# Altium PCB hall_effect_module.PcbDoc
Units mm, origin at the board's own origin, x right, y up, seen from the top; angles counter-clockwise.
Board outline 152.4 x 101.6 mm, 2 copper layers (Top Layer, Bottom Layer), stack 1.569 mm thick; 18 components, 16 nets, 95 pads, 23 vias.
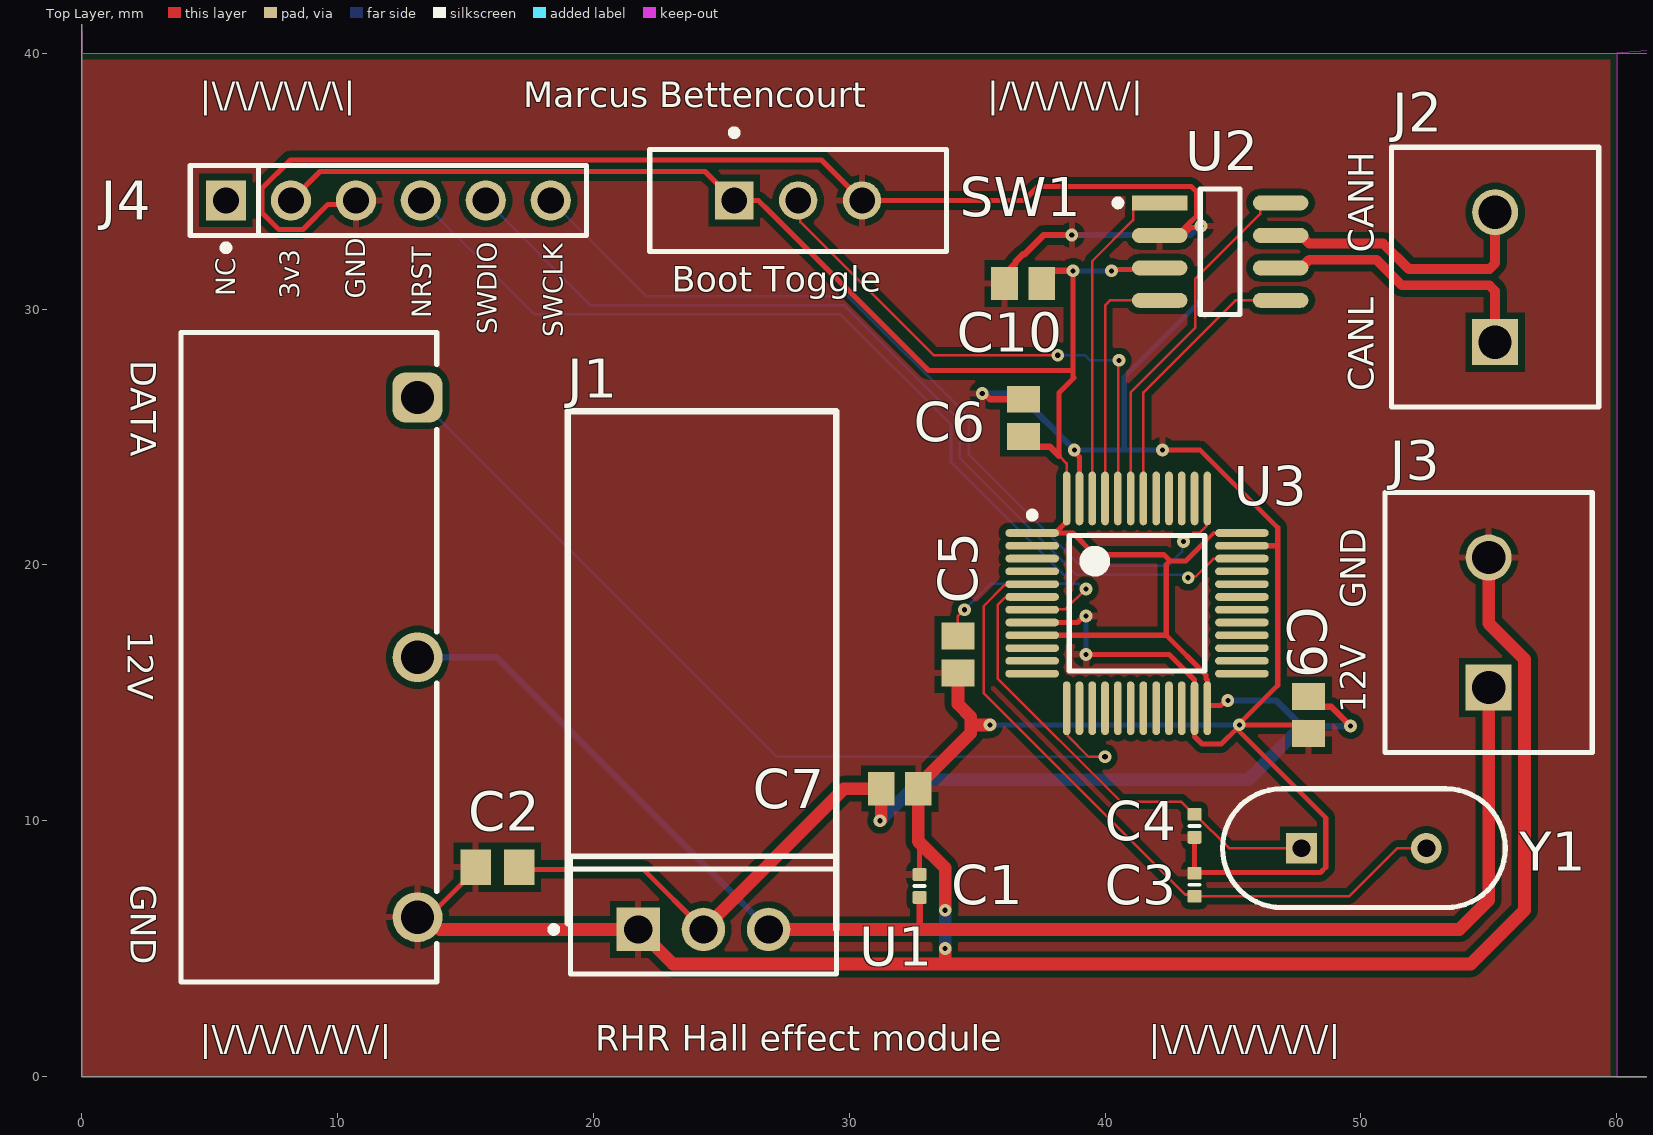
[diagram p0: Top Layer view]
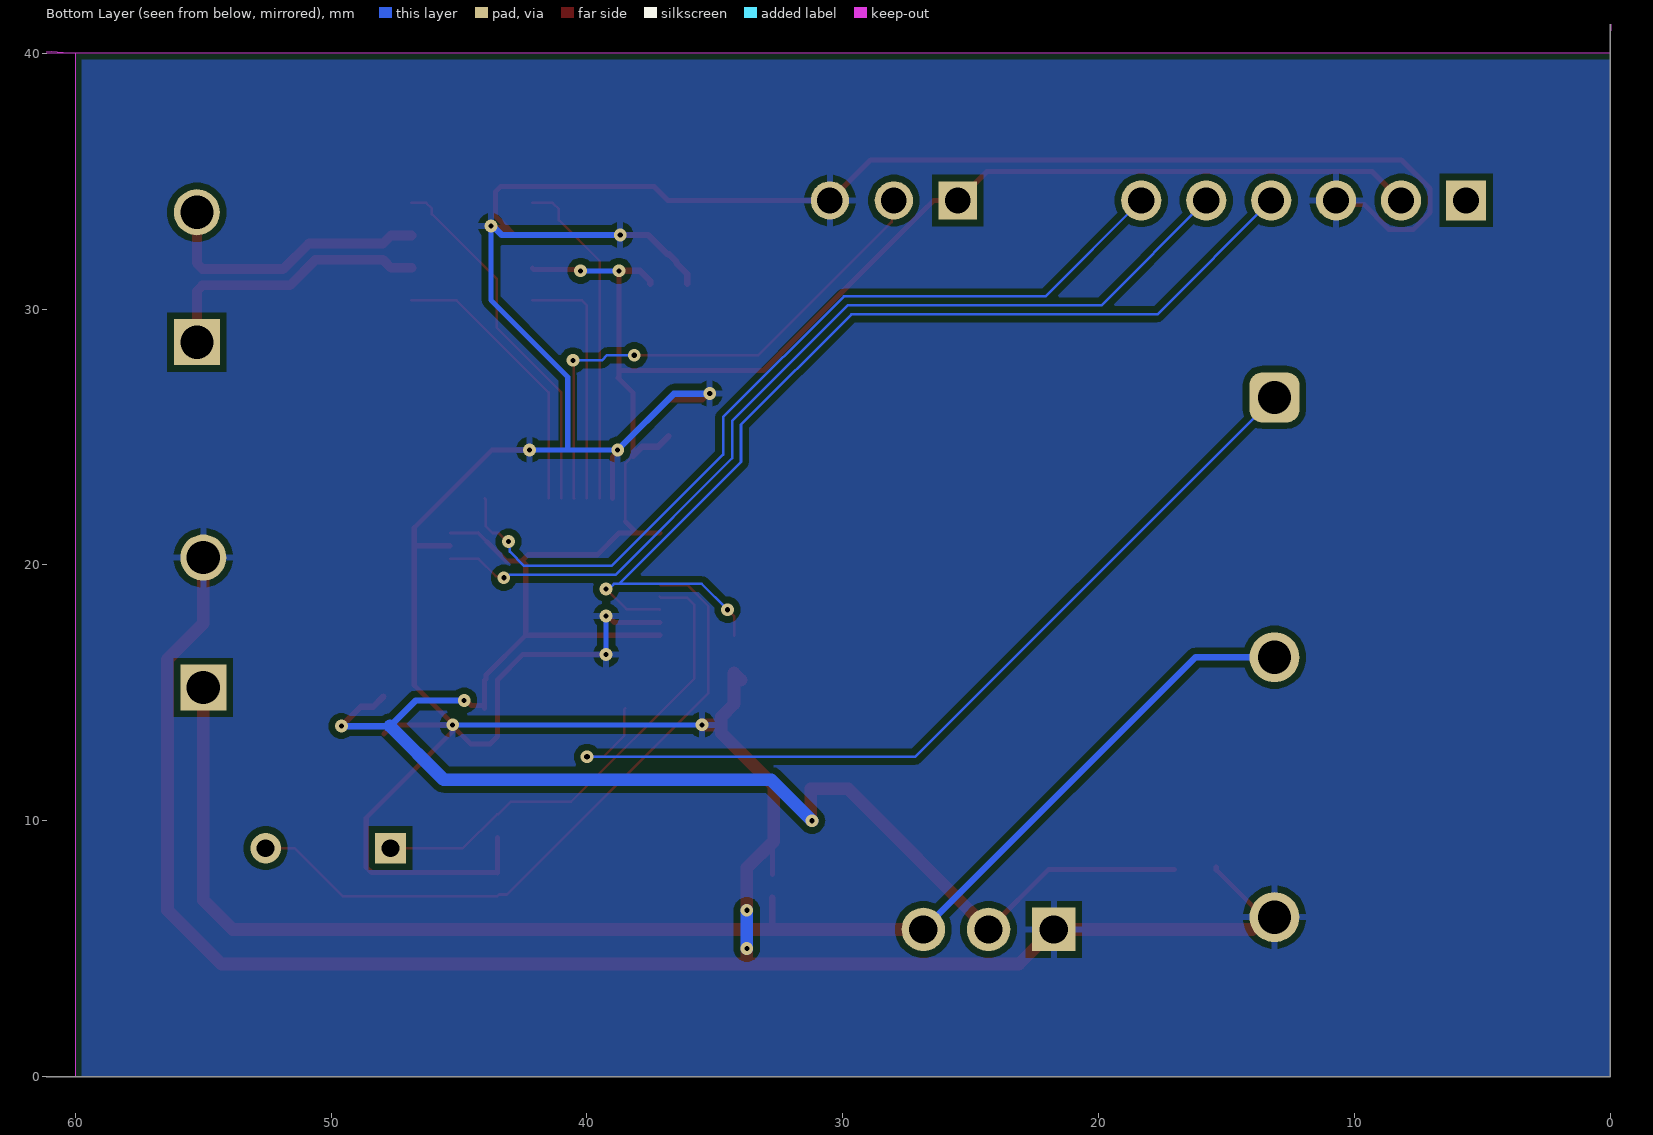
[diagram p1: Bottom Layer view, seen from below]
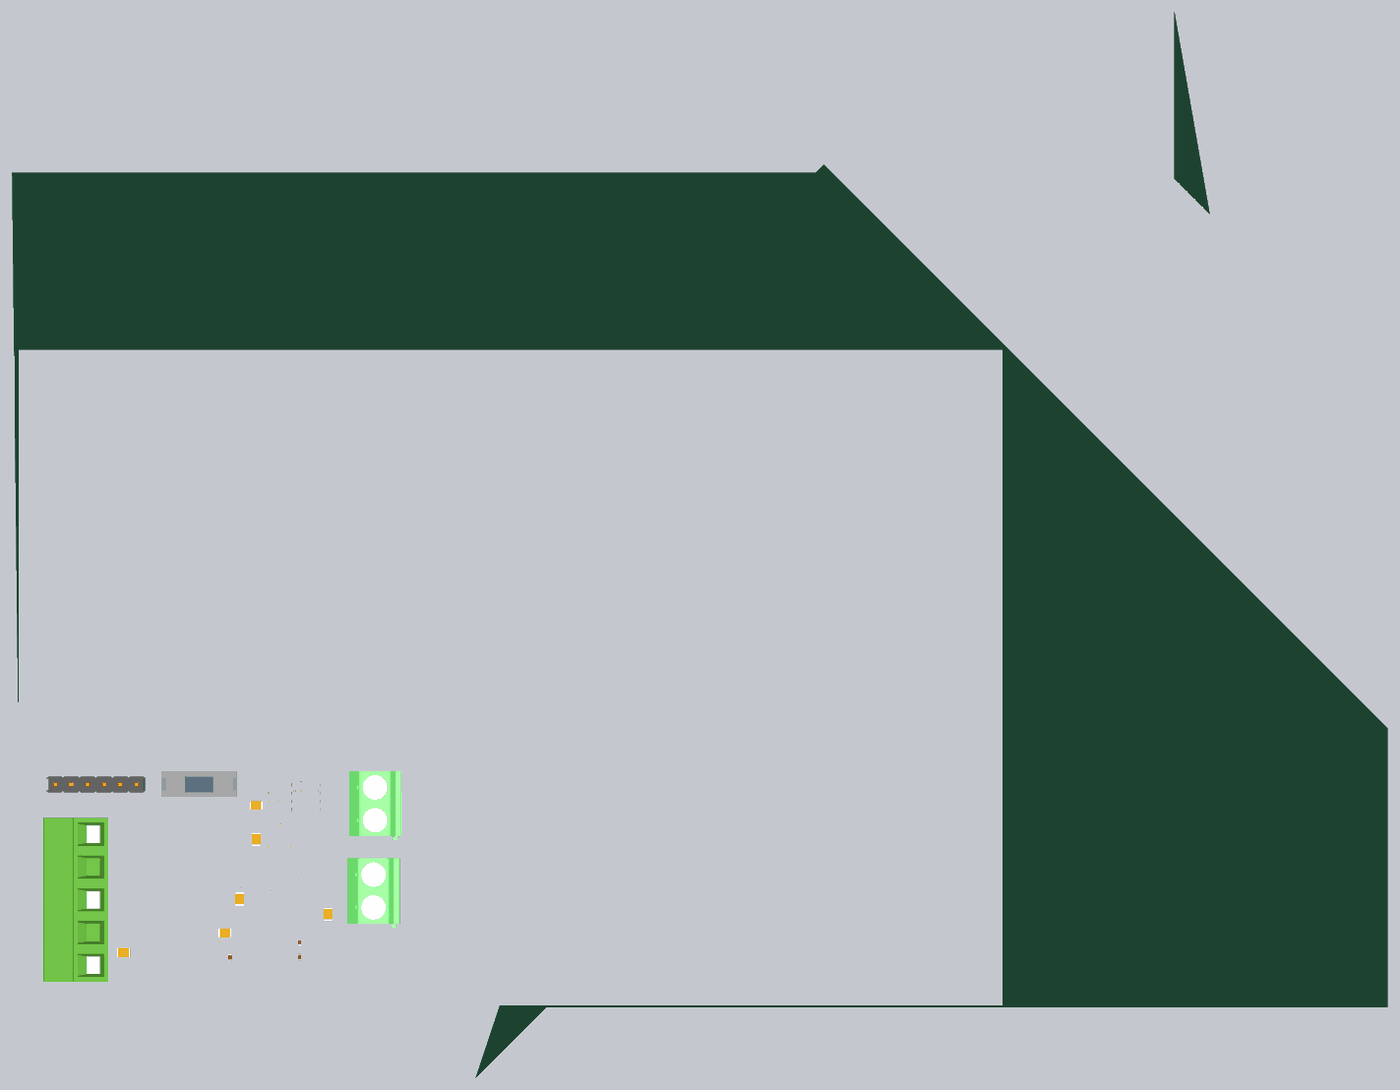
[diagram p2: 3D render of the assembled board from above, using the file's embedded part models]

## Layer stack, top to bottom
Top Solder: solder mask 0.0254, SM-001, Dk 4
Top Layer: signal copper 0.035
Dielectric 1: core 1.4986, Core-043, Dk 4.3
Bottom Layer: signal copper 0.035
Bottom Solder: solder mask 0.0254, SM-001, Dk 4

## Board outline
0,0 152.4,0 152.4,101.6 0,101.6
cut-out: 85,31.5 85,3 70.75,-11.25
cut-out: 60,40 60,0 77.5,0 78.75,1.25 77.75,2.25 77.75,41.5
cut-out: 0,40 75,40 75,0 75.25,-0.25 212,-0.25 212,43 124.75,130.25 123.5,129 -1,129
cut-out: 179,154 179,128 184.5,122.5

## Design rules (kind name [scope] priority, off if disabled: settings)
Clearance Clearance_1 [InComponent('U1')] p1: gap=0.25 ignorepadtopadclearanceinfootprint=TRUE
Clearance [All] p2: gap=0.25 ignorepadtopadclearanceinfootprint=TRUE
DiffPairsRouting [All] p1: maxlimit=0.254 minlimit=0.254 mostfreqgap=0.254 toplayer_minwidth=0.381 toplayer_maxwidth=0.381 toplayer_prefwidth=0.381 bottomlayer_minwidth=0.381 bottomlayer_maxwidth=0.381 bottomlayer_prefwidth=0.381 maxuncoupledlength=12.7
MinimumSolderMaskSliver [All] p1: minsoldermaskwidth=0.2
PolygonConnect [All] p1: connectstyle=Relief reliefconductorwidth=0.254 reliefentries=4 polygonreliefangle="90 Angle" airgapwidth=0.254
RoutingVias [All] p1: holewidth=0.2 width=0.45 viastyle="Through Hole" minholewidth=0.2 minwidth=0.5 maxholewidth=1 maxwidth=1.5
SilkToSolderMaskClearance SilkToSolderMaskClearance_2 [IsPad     & HasFootprint('691241600003')] p1: minsilkscreentomaskgap=0.175 clearancetoexposedcopper=TRUE
SilkToSolderMaskClearance SilkToSolderMaskClearance_1 [IsPad & HasFootprint('CAPC0402(1005)60_L')] p2: minsilkscreentomaskgap=0.125 clearancetoexposedcopper=TRUE
SilkToSolderMaskClearance [IsPad] p3: minsilkscreentomaskgap=0.2 clearancetoexposedcopper=FALSE
SolderMaskExpansion [All] p1: expansion=0 istentingtop=FALSE
SupplyNets "Schematic Supply Nets_2" [InNet('3V3')] p1: voltage=0.000
SupplyNets "Schematic Supply Nets_1" [InNet('GND')] p2: voltage=0.000
SupplyNets "Schematic Supply Nets" [InNet('12V')] p3: voltage=0.000
Width [All] p1: maxlimit=0.75 minlimit=0.1 preferedwidth=0.25 minimp=50.000000 maximp=50.000000 favimp=50.000000
27 further rules are at their usual default settings.

## Classes and differential pairs
differential pair CAN: +CAN_P -CAN_N

## Components (designator, comment, footprint, x,y, rotation, side; value= is the part's Value field where it differs from the comment)
C1 "Capacitor 100nF +/-20% 25V 0402" CAPC0402(1005)60_L 32.75,7.45 r270 top value=100nF
C2 "Capacitor 10 uF +/- 10% 16 V 0805" CAPC2013X135X45NL10T25 16.246,8.182 r0 top value=10µF
C3 "Capacitor 22pF +/-10% 50V 0402" CAPC0402(1005)60_L 43.5,7.5 r270 top value=22pF
C4 "Capacitor 22pF +/-10% 50V 0402" CAPC0402(1005)60_L 43.5,9.8 r90 top value=22pF
C5 "Capacitor 100 nF +/-10% 50 V 0805" CAPC2013X95X50LL10T25 34.25,16.5 r90 top value=100nF
C6 "Capacitor 100 nF +/-10% 50 V 0805" CAPC2013X95X50LL10T25 36.812,25.754 r270 top value=100nF
C7 "Capacitor 100 nF +/-10% 50 V 0805" CAPC2013X95X50LL10T25 31.975,11.25 r180 top value=100nF
C9 "Capacitor 100 nF +/-10% 50 V 0805" CAPC2013X95X50LL10T25 47.954,14.131 r90 top value=100nF
C10 "Capacitor 100 nF +/-10% 50 V 0805" CAPC2013X95X50LL10T25 36.8,31 r0 top value=100nF
J1 "691241600003" 691241600003 8.871,16.39 r270 top
J2 "1729128" PHOE-1729128-2_V 55.25,31.25 r90 top
J3 "1729128" PHOE-1729128-2_V 55,17.75 r90 top
J4 "22-28-4063" FP-22-28-4063-MFG 11.98,34.25 r0 top
SW1 "EG1218" ESWI-EG1218_V 28,34.25 r0 top
U1 "LD1117V33" STM-TO220-3 24.3,5.75 r90 top
U2 "TCAN334DR" FP-D0008A-IPC_B 44.5,32.25 r0 top
U3 "STM32F103C8T6TR" STM-LQFP48_M 41.25,18.5 r0 top
Y1 "49S/18PF" JPY-49S-18PF 50.12,8.926 r0 top

## Footprints (in the part's own frame and the unit in brackets; to place one, negate y for a bottom-side part, rotate by r counter-clockwise, add the part's x,y. Pads: shape width x height; smd on the part's side, far side on the other; paste and mask are expansions set on the pad)
691241600003 [mm] "Vertical Cable Entry with Rising Cage Clamp, pitch 10.16mm, 03p"
  rrect50% 1.95x1.95 hole 1.3: 1(-10.16,4.25)
  round 1.95 hole 1.3: 2(0,4.25) 3(10.16,4.25)
  silkscreen extent -12.7,-5 12.7,5, body extent -12.7,-5 12.7,5, height 8.2
CAPC0402(1005)60_L [mm] "Chip Capacitor, Body 1.0x0.5mm, Height 0.6mm, IPC High Density"
  rrect25% 0.5x0.55 smd: 1(-0.45,0) 2(0.45,0)
  silkscreen extent 0,-0.2 0,0.2, body extent -0.5,-0.25 0.5,0.25, height 0.6
CAPC2013X95X50LL10T25 [mm] "Chip Capacitor, 2-Leads, Body 2.10x1.35mm, IPC High Density"
  rect 1.05x1.3 smd: 1(-0.725,0) 2(0.725,0)
  body extent -1.05,-0.67 1.05,0.67, height 0.95
CAPC2013X135X45NL10T25 [mm] "Chip Capacitor, 2-Leads, Body 2.10x1.35mm, IPC Medium Density"
  rect 1.2x1.4 smd: 1(-0.85,0) 2(0.85,0)
  body extent -1.05,-0.67 1.05,0.67, height 1.35
ESWI-EG1218_V [mm] "THD, 3-Leads, Body 11.6x4mm, Pitch 2.5mm"
  rect 1.5x1.5 hole 1: 1(-2.5,0)
  round 1.5 hole 1: 2(0,0) 3(2.5,0)
  silkscreen extent -5.8,-2 5.8,2.77, body extent -5.8,-2 5.8,2, height 7.4
FP-22-28-4063-MFG [mm]
  rect 1.57x1.57 hole 1.02 paste-2539.97 mask+0: 1(-6.35,0)
  round 1.57 hole 1.02 paste-2539.97 mask+0: 2(-3.81,0) 3(-1.27,0) 4(1.27,0) 5(3.81,0) 6(6.35,0)
  silkscreen extent -7.75,-1.97 7.75,1.37, body extent -7.85,-1.47 7.85,1.47, height 0.25
FP-D0008A-IPC_B [mm]
  rect 2.169x0.582 smd paste+0 mask+0: 1(-2.364,1.905)
  rrect100% 2.169x0.582 smd paste+0 mask+0: 2(-2.364,0.635) 3(-2.364,-0.635) 4(-2.364,-1.905) 5(2.364,-1.905) 6(2.364,-0.635) 7(2.364,0.635) 8(2.364,1.905)
  silkscreen extent -4.12,-2.45 0.78,2.45, body extent -3.7,-2.7 3.7,2.7, height 0.25
JPY-49S-18PF [mm] "THD, 2-Leads, Body 11.05x4.65mm, Pitch 4.88mm"
  rect 1.2x1.2 hole 0.7: 1(-2.44,0)
  round 1.2 hole 0.7: 2(2.44,0)
  silkscreen extent -5.53,-2.32 5.53,2.32, body extent -5.52,-2.32 5.53,2.33, height 3.5
PHOE-1729128-2_V [mm] "Receptacle, 2-Leads, Body 8.1x10.16mm, Pitch 5.08mm"
  rect 1.8x1.8 hole 1.3: 1(-2.54,0)
  round 1.8 hole 1.3: 2(2.54,0)
  silkscreen extent -5.08,-4.05 5.08,4.05, body extent -5.65,-4.05 5.08,4.05, height 10.01
STM-LQFP48_M [mm] "QFP, 48-Leads, Body 7x7mm, Pitch 0.5mm, IPC Low Density"
  oval 2.1x0.3 smd: 1(-4.1,2.75) 2(-4.1,2.25) 3(-4.1,1.75) 4(-4.1,1.25) 5(-4.1,0.75) 6(-4.1,0.25) 7(-4.1,-0.25) 8(-4.1,-0.75) 9(-4.1,-1.25) 10(-4.1,-1.75) 11(-4.1,-2.25) 12(-4.1,-2.75) 25(4.1,-2.75) 26(4.1,-2.25) 27(4.1,-1.75) 28(4.1,-1.25) 29(4.1,-0.75) 30(4.1,-0.25) 31(4.1,0.25) 32(4.1,0.75) 33(4.1,1.25) 34(4.1,1.75) 35(4.1,2.25) 36(4.1,2.75)
  oval 0.3x2.1 smd: 13(-2.75,-4.1) 14(-2.25,-4.1) 15(-1.75,-4.1) 16(-1.25,-4.1) 17(-0.75,-4.1) 18(-0.25,-4.1) 19(0.25,-4.1) 20(0.75,-4.1) 21(1.25,-4.1) 22(1.75,-4.1) 23(2.25,-4.1) 24(2.75,-4.1) 37(2.75,4.1) 38(2.25,4.1) 39(1.75,4.1) 40(1.25,4.1) 41(0.75,4.1) 42(0.25,4.1) 43(-0.25,4.1) 44(-0.75,4.1) 45(-1.25,4.1) 46(-1.75,4.1) 47(-2.25,4.1) 48(-2.75,4.1)
  silkscreen extent -4.22,-2.65 2.65,3.57, body extent -3.5,-3.5 3.5,3.5, height 1.6
STM-TO220-3 [mm] "FM, 3-Leads, Body 10.4x4.6mm, Pitch 2.55mm"
  rect 1.7x1.7 hole 1.1: 1(0,2.55)
  round 1.7 hole 1.1: 2(0,0) 3(0,-2.55)
  silkscreen extent -1.74,-5.2 2.86,5.97, body extent -1.74,-5.2 2.86,5.2, height 19.68

## Part data
C1: library part CMP-001-00065-4, "Chip Capacitor, 100nF +/-20%, 25V, 0402, Thickness 0.6 mm", Case/Package=0402, Max Operating Temperature=85°C, Min Operating Temperature=-55°C, Tolerance=10%, Voltage Rating=25V, Mounting Technology=SMT, Pins=2
C2: library part CMP-001-00015-6, "Chip Capacitor, 10 uF, +/- 10%, 16 V, 0805 (2012 Metric)", Capacitor Type=Ceramic, Case/Package=0805, Max Operating Temperature=85°C, Min Operating Temperature=-55°C, Tolerance=10%, Voltage Rating=16V, Mounting Technology=SM, Pins=2, RoHS Compliant=True
C3 C4: library part CMP-001-00073-3, "Chip Capacitor, 22pF +/-10%, 50V, 0402, Thickness 0.6 mm", Case/Package=0402, Max Operating Temperature=85°C, Min Operating Temperature=-55°C, Tolerance=10%, Voltage Rating=50V, Mounting Technology=SMT, Pins=2
C5 C6 C7 C9 C10: library part CMP-001-00018-6, "Chip Capacitor, 100 nF, +/- 10%, 50 V, 0805 (2012 Metric)", Capacitor Type=Ceramic, Case/Package=0805, Max Operating Temperature=125°C, Min Operating Temperature=-55°C, Tolerance=10%, Voltage Rating=50V, Mounting Technology=SM, Pins=2, RoHS Compliant=True
J1: library part CMP-03913-78871229-2, "Terminal Block, 10.16MM Pitch, Vertical, Rising Cage Clamp, 14-30 AWG, 3 Pin", Lead Pitch=10.16mm, Number of Pins=3, Packaging=Box
J2 J3: library part CMP-2000-05815-1, "PCB Terminal Block, 13.5 A, 400 V, 2-Pin THD, RoHS, Bulk", Current Rating=13500mA, Manufacturer="Phoenix Contact", Package Description="2-Pin Through Hole Device, Body 8.1 x 10.16 mm, Pitch 5.08 mm", Package Reference=1729128-2, Package Version=03/2015, Voltage Rating=400V, Datasheet URL=https://datasheet.ciiva.com/16046/1729128-16046181.pdf, Datasheet Version=12/2013, Manufacturer URL=http://www.phoenixcontact.com/, Mounting Technology=ThroughHole, No. of Positions=2, No. of Rows=1, Orientation=Horizontal, Package URL=https://www.phoenixcontact.com/online/portal/pi/pxc/product_detail_page/!ut/p/b1/3VdJjqNKFDxLH8AFycySyWY2ozFsEPOMMQaDOX1XedGL_1Vdm5YXJleknhSKeBkvI6EA8ncAo3AYoDhBQGco6KN7VURTdemj9us_IEKEZo_YHiPAEWEFmDGOHMORkqKYCORBZxgL7ZoaZYcbFFUZ3fqxSY6GOuxydWUuHqz1ynmMFygu583Bob0Ewr6Sd_l-5m-kAueHiB0jpRwZwe58wwtkpxtMYd_LmGcDRU02dRNEyWt6Y2ti5pSyJ_reIkzIulrqApdnbT11V5jnCKbYNCvhEM1MCpPByat_X379-iThf08CI5GfOPqfBeS3BRoBOdD55AKVv0iLwCMq-2BrzXWSGRH7pUGD9uwXQjiph3xL0DKQwdGa0JImiIOmBNOestqgwTHSSs2oOep-78apyXQBvNi8ZLaFjvjWvcaUEBu0MC6Wbe-d6mB0FAebo2lUWinqYaZs5DAYzV0RP9yitUjnGJ0iI9xhZkT42OCQNUJJhkgWINNQLP2JFP6OpMg3JCVg70jqHT0lvKOnhHf0lPuOnnLf0VPuWx6_dxwUIvwk5WMkT0kLL1mh61l2yZVSzG3pYV_bqo-mj6uMKwKwdnnW8Jh5RTOJzMOA5c-eJDaZQw4mTMPH02PvS_ZAqNVjVTo2WyYLkwH_KU1mmmG5kjRhDqPXLwwVHvVOjCM60-fpXvTDfMGW1PVFVS1r4e4yVDk4ZdNbkUHvqPqQSeian4UD39fNKmachqdJ1NJbyk8rXT9mXTvPk3oE5meulKGgiruPJek-4I9hTT6G8ZLOyRSm2RRVbThERQad5OS28hdt4YW4vG0stgYYzsWsK4_7y6DZMjJSCqri1kyiZR5vD7pwIrNR7QwPHTcLTI5qT7eRlpHrdGiupYlqQDJ7zy_CND8fWWBoLRXxk1RVcXiBQwbTD4Xi7KL-FuO94t9xaqweXzH, Packing=Bulk, PartNumber=1729128, Pitch=5.08mm, RoHS=TRUE
J4: library part CMP-04776-000885-1, "CONN HEADER VERT 6POS 2.54MM", Color=Black, Contact Resistance=20mR, Current Rating=4A, Flammability Rating="UL94 V-0", Max Operating Temperature=75°C, Max Voltage Rating (AC)=250V, Max Voltage Rating (DC)=250.25kV, Min Operating Temperature=0°C, Package Quantity=1, Connector Type="Male Pin", Contact Material=Brass, Contact Mating Length=0.24inch, Contact Plating=Gold, Contact Type="Male Pin", Depth=2.49mm, Gender=Male, Glow Wire Compliant=Non-compliant, Housing Color=Black, Housing Material=Thermoplastic, Lead Free="Lead Free", Mount="Through Hole", Number Of Circuits=6, Number of Contacts=6, Number of Positions=6, Number of Rows=1, Orientation=Straight, Packaging=Bulk, Pitch=2.54mm, Radiation Hardening=No, RoHS Compliant=Yes, Series="KK® 42375", Termination=Solder, Voltage Rating=250V, Voltage Rating (DC)=250V
SW1: library part CMP-011-00006-2, "Slide Switch, SPDT, 500 V, -20 to 70 degC, 3-Pin THD, RoHS, Bulk", Contact Current Rating=200mA, Manufacturer=E-Switch, Max Operating Temperature=70°C, Min Operating Temperature=-20°C, Operating Force=250gf, Package Description="3-Pin Through Hole Device, Body 11.6 x 4 mm, Pitch 2.5 mm", Package Quantity=1000, Voltage Rating (AC)=30V, Case/Package=EG1218, Contact Finish=Silver, Contact Material=Copper, Contact Plating=Silver, Current Rating=200mA, Datasheet URL=https://www.e-switch.com/system/asset/product_line/data_sheet/119/EG.pdf, Datasheet Version=Oct-15, Manufacturer URL=http://www.e-switch.ch/en/, Mounting Technology=TH, Package Reference=EG1218, Packaging=Bulk, Pins=3, RoHS Compliant=True, Throw Configuration=SPDT, Voltage Rating (DC)=30V
U1: library part CMP-019-00020-3, "Low Drop Positive Voltage Regulator, 800 mA, Fixed 3.3 V Output, 0 to 125 degC, 3-Pin TO-220, RoHS, Tube", Case/Package=TO-220-3, Dropout Voltage=1.1V, Manufacturer=STMicroelectronics, Max Input Voltage=15V, Max Operating Temperature=125°C, Max Ouput Current=800mA, Min Input Voltage=4.4V, Min Operating Temperature=0°C, Min Supply Voltage=4.75V, Nominal Output Voltage=3.3V, Output Current=1.3A, Package Quantity=50, Power=12W, Datasheet URL=http://www.farnell.com/datasheets/1776449.pdf, Datasheet Version="Rev. A, 07/2003", Manufacturer URL=http://www.st.com/, Max Supply Voltage=15V, Output Voltage=3.3V, Outputs=1, Packaging=Rail/Tube, Pins=3, RoHS Compliant=True
U2: library part CMP-04872-000081-1, "IC TRANSCEIVER 1/1 8SOIC", Case/Package=SOIC, Max Operating Temperature=125°C, Max Supply Voltage=3.6V, Min Operating Temperature=-40°C, Min Supply Voltage=3V, Data Rate=1Mbps, Interface=CAN, Lead Free="Lead Free", Mount="Surface Mount", Number of Pins=8, Number of Receive Buffers=1, Number of Transmit Buffers=1, Packaging="Cut Tape", REACH SVHC="No SVHC", Receiver Hysteresis=120mV, RoHS Compliant=Yes
U3: library part CMP-0237-00216-3, "ARM Cortex-M3 32-bit MCU, 64 KB Flash, 20 KB Internal RAM, 37 I/Os, 48-pin LQFP, -40 to 85 degC, Tape and Reel", I/Os (High Current)=37, Operating Frequency(F) (Processor speed) (MHz)=72, Supply Voltage(Vcc) min (V)=2, A/D Converter="2x12-bit (10 Channel)", ComponentLink1Description="Manufacturer URL", ComponentLink1URL=http://www.st.com/web/en/home.html, ComponentLink2Description=Datasheet, ComponentLink2URL=http://www.st.com/st-web-ui/static/active/en/resource/technical/document/datasheet/CD00161566.pdf, ComponentLink3Description="Package Specification", ComponentLink3URL=http://www.st.com/st-web-ui/static/active/en/resource/technical/document/datasheet/DM00058181.pdf, Core="ARM Cortex-M3", DatasheetVersion="Rev. 16", FLASH Size (Prog) (kB)=64, Internal RAM Size (kB)=20, Mounting Technology="Surface Mount", PackageDescription="48-Pin Low Profile Quad Flat Package, 7 x 7 mm Body, 0.5 mm Pitch", PackageReference=LQFP48, PackageVersion="Rev. 6, 06/2013", Packing="Tape and Reel", PartNumber=STM32F103C8T6TR
Y1: library part CMP-003-00000-2, "Crystal, 16 MHz, +/-20 ppm, 18 pF, -20 to 70 degC, 2-Pin THD, RoHS", Case/Package=49S-18PF, Frequency=16MHz, Manufacturer="Shenzhen Jingpengyuan", Package Description="2-Pin Through Hole Device, Body 11.05 x 4.65 mm, Pitch 4.88 mm", Datasheet URL=http://datasheet.octopart.com/49S-18PF-Xinhunjing-datasheet-30677139.pdf, Datasheet Version=Aug-14, Manufacturer URL=http://www.chjiahui.com/, Mounting Technology=TH, Package Reference=49S-18PF, RoHS Compliant=Unknown

## Via types
v1: diameter 0.5, hole 0.2, Top Layer to Bottom Layer, 22 vias
v2: diameter 0.5, hole 0.225, Top Layer to Bottom Layer, 1 vias

## Nets (pads, with @x,y where several pads share a name; then routed paths per layer and width w, separated by ;. In a path a pad name is that pad's centre, name@x,y a point inside that pad or via, vN(x,y) a via of type N, cw(c..) or ccw(c..) an arc to the next point about the centre after c; other vN are vias at no path point)
3V3: C2.2 C6.2 C7.2 C9.2 C10.2 J4.2 SW1.1 U1.2 U2.3 U3.1 U3.9 U3.24 U3.36 U3.48 | length 117.5
  Top Layer w0.1: 38.2,24.272 38.5,23.972 U3.48 U3.48@38.5,21.7 ; 44.25,21.25 U3.36
  Top Layer w0.15: 43.9,20.9 44.25,21.25
  Top Layer w0.2: J4.2 9.305,35.385 24.365,35.385 SW1.1 26.444,34.25 26.9,33.794 33.094,27.6 38.75,27.6 ; C2.2@17.024,8.1 21.95,8.1 U1.2 ; U3.9 42.393,17.25 ; U3.1 U3.1@38.05,21.25 ; 38.2,24.272 38.2,26.736 38.782,27.318 ; U3.48@38.5,21.7 U3.1@38.05,21.25 ; 38.75,27.35 38.75,27.6 ; v1(38.75,31.5) 38.75,27.6 ; v1(40.25,31.5) 40.307,31.557 42.079,31.557 U2.3 ; 43.9,20.9 43.161,20.161 42.539,20.161 ; U3.24 44,15.493 43.95,15.543 43.95,15.693 42.393,17.25 ; U3.24@44,14.454 44.046,14.5 44.519,14.5 44.719,14.7 v1(44.8,14.7) ; U3.1@38.05,21.25 38.743,21.25 39.593,20.4 42.3,20.4 42.539,20.161 ; 42.393,17.25 42.393,20.016 42.539,20.161
  Top Layer w0.25: C6.2 37.212,24.629 37.843,24.629 38.2,24.272 ; C10.2 37.525,31.1 37.925,31.5 v1(38.75,31.5) ; C9.2 48.354,14.456 48.844,14.456 v1(49.6,13.7)
  Top Layer w0.5: U1.2 29.8,11.25 C7.2 31.25,10.05 v1(31.2,10)
  Bottom Layer w0.2: v1(38.75,31.5) v1(40.25,31.5)
  Bottom Layer w0.25: v1(44.8,14.7) 46.7,14.7 47.7,13.7 v1(49.6,13.7)
  Bottom Layer w0.5: v1(31.2,10) 32.8,11.6 45.6,11.6 47.7,13.7
12V: C1.2 J1.2 J3.1 U1.3 | length 56.3
  Top Layer w0.25: 32.75,5.75 C1.2
  Top Layer w0.5: U1.3 32.75,5.75 53.85,5.75 55,6.9 J3.1
  Bottom Layer w0.25: J1.2 16.21,16.39 U1.3
BOOT0: SW1.2 U3.44 | length 21
  Top Layer w0.1: SW1.2 28.091,34.159 28.091,33.409 33.3,28.2 v1(38.15,28.2) ; U3.44 40.525,22.625 40.525,27.975 v1(40.55,28)
  Bottom Layer w0.1: v1(38.15,28.2) 39.212,28.2 39.412,28 v1(40.55,28)
CAN_N: J2.1 U2.6 | length 11
  Top Layer w0.381: U2.6 47.663,31.615 47.981,31.932 50.611,31.932 51.611,30.933 55.027,30.933 55.25,30.709 J2.1
CAN_P: J2.2 U2.7 | length 11
  Top Layer w0.381: U2.7 47.663,32.885 47.981,32.567 50.874,32.567 51.874,31.568 55.027,31.568 55.25,31.791 J2.2
CAN_RX: U2.4 U3.45 | length 9.8
  Top Layer w0.1: U3.45 40,30.15 40.195,30.345 U2.4
CAN_TX: U2.1 U3.46 | length 13.1
  Top Layer w0.1: U3.46 39.5,31.878 41.102,33.48 41.102,33.914 41.343,34.155 U2.1
GND: C1.1 C2.1 C3.1 C4.1 C5.1 C6.1 C7.1 C9.1 C10.1 J1.3 J3.2 J4.3 SW1.3 U1.1 U2.2 U3.8 U3.23 U3.35 U3.47 | length 209.6
  Top Layer w0.2: J4.3 10.56,34.1 9.625,34.1 8.64,33.115 7.7,33.115 7.035,33.78 7.035,34.72 8.15,35.835 28.915,35.835 SW1.3 36.836,34.25 37.382,34.796 43.366,34.796 43.571,34.591 43.571,33.637 43.287,33.353 43.287,33.345 U2.2@42.827,32.885 ; J1.3 13.544,6.23 15.396,8.082 C2.1 ; 32.7,9.2 32.75,9.15 C1.1 ; U3.8 38.919,17.75 39.169,18 v1(39.25,18) ; v1(38.8,24.5) 38.8,24.419 39,24.219 U3.47 ; v1(39.25,16.5) 42.507,16.5 43.5,15.507 U3.23 43.5,13.293 43.793,13 44.547,13 v1@45.145,13.598 ; U2.2 U2.2@42.827,32.885 ; v1(42.25,24.5) 43.707,24.5 46.75,21.457 46.75,20.75 ; C4.1 C3.1 43.526,7.976 48.425,7.976 48.63,8.181 48.63,10.113 v1@45.145,13.598 ; v1(43.75,33.25) 43.693,33.193 43.341,33.193 43.033,32.885 U2.2@42.827,32.885 ; v1@45.145,13.645 v1@45.145,13.598 ; v1@45.247,13.747 45.247,13.79 46.75,15.293 46.75,20.75 ; v1(45.25,13.75) 47.585,13.75 C9.1@47.941,13.394 ; U3.35 46.75,20.75
  Top Layer w0.25: v1(35.2,26.7) 35.268,26.7 35.489,26.479 C6.1 ; C10.1 36.075,31.375 36.5,31.8 36.5,31.857 36.793,32.15 36.85,32.15 37.6,32.9 v1(38.7,32.9)
  Top Layer w0.5: J1.3 13.513,6.23 13.993,5.75 U1.1 23.104,4.396 33.75,4.396 ; v1(33.75,5) 33.75,4.396 ; v1(33.75,6.5) 33.75,8.15 32.7,9.2 32.7,11.375 34.75,13.425 34.75,13.743 ; C5.1@33.975,15.5 C5.1 34.25,14.561 34.75,14.061 34.75,13.743 ; v1(35.5,13.75) 35.493,13.743 34.75,13.743 ; J3.2 55,17.717 56.4,16.317 56.4,6.5 54.296,4.396 33.75,4.396
  Bottom Layer w0.2: v1(35.5,13.75) v1(45.25,13.75) ; v1(38.8,24.5) 40.75,24.5 ; v1(39.25,16.5) v1(39.25,18) ; v1(42.25,24.5) 40.75,24.5 ; v1(43.75,33.25) 43.75,30.351 40.75,27.351 40.75,24.5
  Bottom Layer w0.25: v1(35.2,26.7) 36.6,26.7 v1(38.8,24.5) ; v1(38.7,32.9) 43.332,32.9 43.682,33.25 v1(43.75,33.25)
  Bottom Layer w0.5: v1(33.75,5) v1(33.75,6.5)
Hall: J1.1 U3.13 | length 35.6
  Top Layer w0.1: U3.13 38.538,14.362 38.538,13.325 39.364,12.5 v2(40,12.5)
  Bottom Layer w0.1: J1.1 27.171,12.5 v2(40,12.5)
NRST: C5.2 J4.4 U3.7 | length 41.4
  Top Layer w0.1: C5.2 34.25,18 v1(34.5,18.25) ; U3.7 37.17,18.27 38.458,18.27 v1(39.25,19.061)
  Bottom Layer w0.1: J4.4 17.7,29.8 29.665,29.8 33.977,25.488 33.977,24.028 38.744,19.261 ; v1(34.5,18.25) 35.511,19.261 38.744,19.261 ; v1(39.25,19.061) 39.142,19.061 38.942,19.261 38.744,19.261
OSC_IN: C3.2 U3.5 Y1.2 | length 27
  Top Layer w0.1: U3.5 37.112,19.212 36.075,19.212 35.25,18.386 35.25,15 43.134,7.116 43.434,7.116 C3.2 ; C3.2@43.525,7.05 49.55,7.05 51.426,8.926 Y1.2
OSC_OUT: C4.2 U3.6 Y1.1 | length 19
  Top Layer w0.1: U3.6 37.112,18.712 36.075,18.712 35.8,18.436 35.8,15.564 40.614,10.75 42.975,10.75 43.475,10.25 C4.2 ; C4.2@43.525,10.25 44.849,8.926 Y1.1
SHDN: U2.5 U3.42 | length 11
  Top Layer w0.1: U3.42 41.5,26.75 45.095,30.345 U2.5
STB: U2.8 U3.43 | length 14.3
  Top Layer w0.1: U3.43 41,26.745 43.521,29.266 43.521,31.172 46.063,33.714 46.063,33.932 46.286,34.155 U2.8
SWCLK: J4.6 U3.37 | length 34.3
  Top Layer w0.1: v1(43.069,20.917) 43.117,20.917 43.45,21.25 43.686,21.25 43.962,21.525 43.962,22.562 U3.37
  Bottom Layer w0.1: J4.6 22.08,30.5 29.955,30.5 34.677,25.778 34.677,24.318 39.034,19.961 42.461,19.961 43.017,20.517 43.017,20.866 v1(43.069,20.917)
SWDIO: J4.5 U3.34 | length 36.8
  Top Layer w0.1: v1(43.25,19.5) 43.308,19.558 43.558,19.558 44.238,20.238 45.338,20.238 U3.34
  Bottom Layer w0.1: J4.5 19.89,30.15 29.81,30.15 34.327,25.633 34.327,24.173 38.889,19.611 43.03,19.611 43.142,19.5 v1(43.25,19.5)
pads on no net: J4.1 U3.2 U3.3 U3.4 U3.10 U3.11 U3.12 U3.14 U3.15 U3.16 U3.17 U3.18 U3.19 U3.20 U3.21 U3.22 U3.25 U3.26 U3.27 U3.28 U3.29 U3.30 U3.31 U3.32 U3.33 U3.38 U3.39 U3.40 U3.41

## Polygon pours and split planes (outlines as drawn)
GND on Bottom Layer "Bottom" (solid, pour order 1): 0,0 152.4,0 152.4,101.6 0,101.6
GND on Top Layer "Top" (solid, pour order 0): 0,0 152.4,0 152.4,101.6 0,101.6

## Silkscreen, mask and mechanical layers (free items; w line width, h text height)
Top Overlay:
  lines w0.254: 19,6 19,26 29.5,26 29.5,5.75
  text "|\/\/\/\/\/\|" at 4.6,37.9 h1
  text "Marcus Bettencourt" at 17.251,37.9 h1
  text "|/\/\/\/\/\/|" at 35.4,37.9 h1
  text "CANH" at 50.5,32.2 h1 r90
  text "Boot Toggle" at 23.054,30.687 h1
  text "NC" at 6,30.5 h0.75 r90
  text "3v3" at 8.5,30.4 h0.75 r90
  text "GND" at 11.075,30.4 h0.75 r90
  text "NRST" at 13.65,29.65 h0.75 r90
  text "SWDIO" at 16.225,29.025 h0.75 r90
  text "SWCLK" at 18.8,28.9 h0.75 r90
  text "DATA" at 1.9,28 h1 r270
  text "CANL" at 50.5,26.8 h1 r90
  text "GND" at 50.2,18.3 h1 r90
  text "12V" at 1.8,17.4 h1 r270
  text "12V" at 50.2,14.2 h1 r90
  text "GND" at 1.9,7.5 h1 r270
  text "|\/\/\/\/\/\/\/|" at 4.6,1 h1
  text "RHR Hall effect module" at 20.068,1 h1
  text "|\/\/\/\/\/\/\/|" at 41.7,1 h1